# Allegro board Pressure_v1.0_BL.brd
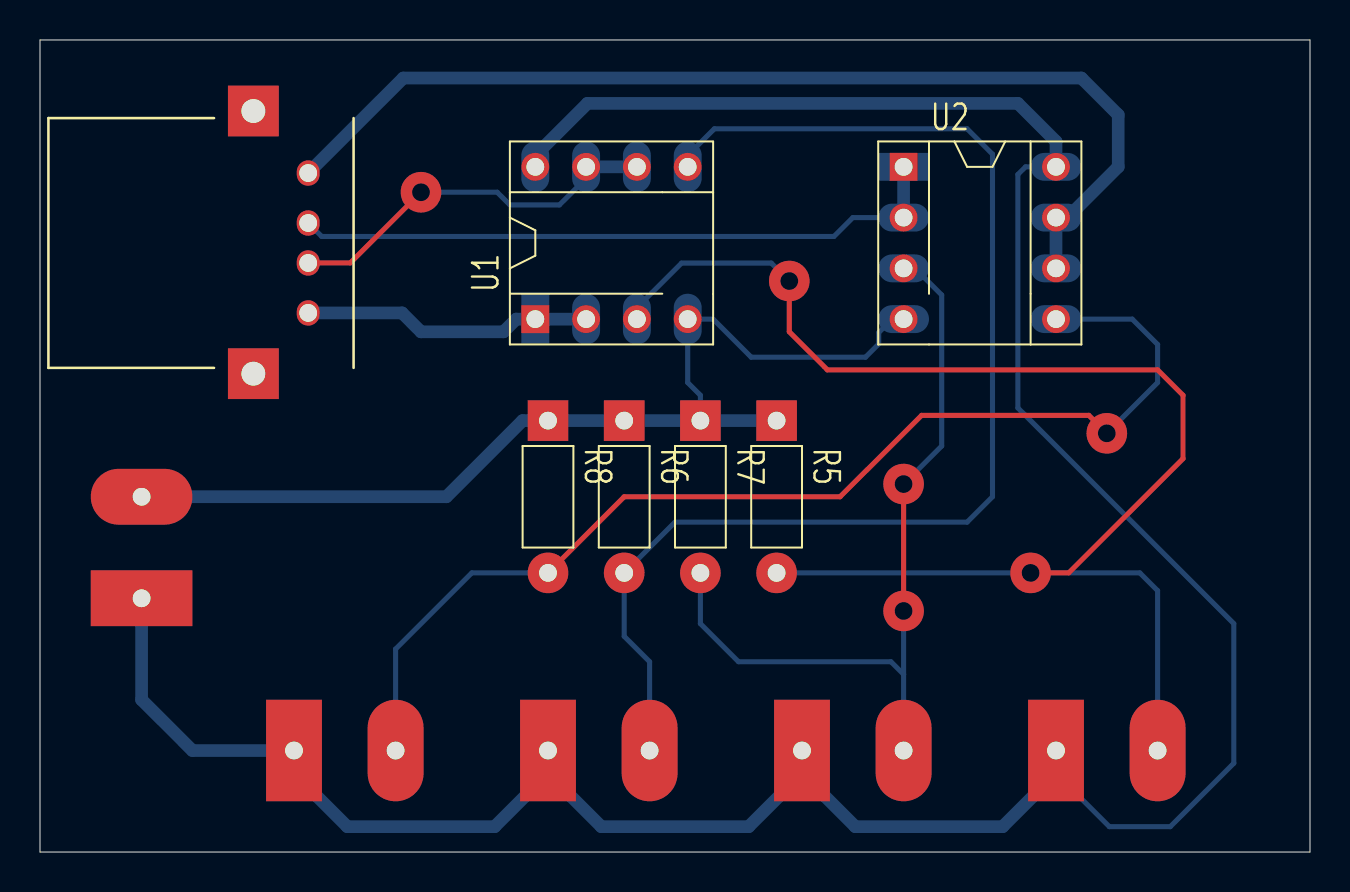
[diagram p0: board, top side]
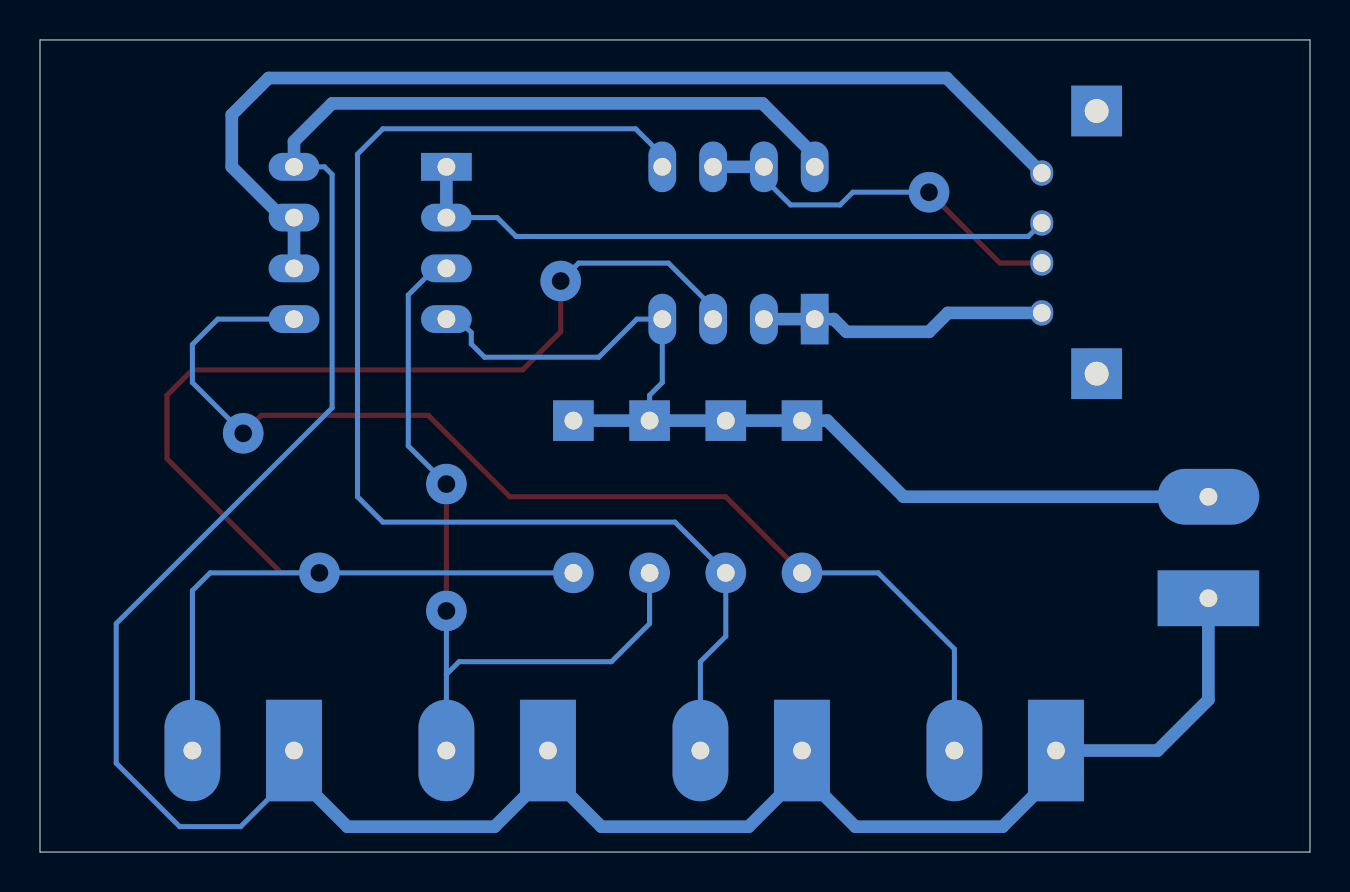
[diagram p1: board, bottom side, seen from below]

Outline 63.5 x 40.64 mm; copper layers: TOP, BOTTOM. Coordinates in mm from the lower left corner of the outline.
Outline path: 0,40.64 0,0 63.5,0 63.5,40.64 0,40.64

## Design rules (mm)
constraint set DEFAULT: min track width 0.254

## Placement (name value [footprint] x y rotation side)
J3  4 HEADER  [USB-A]  12.7 30.48 270 top
J4  HEADER 2  [GU-TERMINAL2-200]  5.08 12.7 180 top
J5  HEADER 2  [GU-TERMINAL2-200]  12.7 5.08 90 top
J6  HEADER 2  [GU-TERMINAL2-200]  38.1 5.08 90 top
J7  HEADER 2  [GU-TERMINAL2-200]  25.4 5.08 90 top
J8  HEADER 2  [GU-TERMINAL2-200]  50.8 5.08 90 top
R5  100k  [GU-RC300]  36.83 21.59 270 top
R6  100k  [GU-RC300]  29.21 21.59 270 top
R7  100k  [GU-RC300]  33.02 21.59 270 top
R8  100k  [GU-RC300]  25.4 21.59 270 top
U1  LF353  [GU-DIPSOCK8]  24.77 26.67 90 top
U2  LF353  [GU-DIPSOCK8]  43.18 34.29 0 top

## Library data of the parts
J3 = 4 HEADER
J4-J8 = HEADER 2: User Part Number: TERMINAL2-200
R5-R8 = R
U1 U2 = LF353

## Footprints (pads in the part's own frame, mm; a bottom-side part is the same pattern mirrored in y, then rotated)
GU-DIPSOCK8
  rect 1.397x1.397 hole 0.889: 1(0,0)
  round 1.397 hole 0.889: 2(0,-2.54) 3(0,-5.08) 4(0,-7.62) 5(7.62,-7.62) 6(7.62,-5.08) 7(7.62,-2.54) 8(7.62,0)
GU-RC300
  rect 2.032x2.032 hole 0.889: 1(0,0)
  round 2.032 hole 0.889: 2(7.62,0)
GU-TERMINAL2-200
  rect 5.08x2.794 hole 0.889: 1(0,0)
  oval 5.08x2.794 hole 0.889: 2(0,-5.08)
USB-A
  rect 2.54x2.54 hole 1.194: (-6.604,-2.032) (6.54,-2.032)
  oval 1.27x1.143 hole 0.889: 1(-3.5,0.71) 2(-1,0.71) 3(1,0.71) 4(3.5,0.71)

## Nets
5V: J4.1 J5.1 J6.1 J7.1 J8.1 U1.8 U2.8
GND: J4.2 R5.1 R6.1 R7.1 R8.1 U1.4 U2.4
VOUT1: J3.4 U1.1 U1.2
VOUT2: J3.3 U1.6 U1.7(OUT)
VOUT3: J3.2 U2.1 U2.2
VOUT4: J3.1 U2.6 U2.7(OUT)
N57936: J8.2 R5.2 U1.3
N58002: J7.2 R6.2 U1.5
N58075: J6.2 R7.2 U2.3
N58149: J5.2 R8.2 U2.5

## Via types
v1: diameter 2.032, hole 0.889, TOP to BOTTOM, 6 vias

## Routing (per net, layer and track width the routed paths; a pad name or vN(x,y) marks a point on that pad's centre or on a via; arc(x,y) is an arc through that point)
5V: length 140.1
  BOTTOM w0.254: 38.1,3.94 J6.1 ; 25.4,3.94 J7.1 ; 50.8,3.94 53.47,1.27 56.52,1.27 59.69,4.45 59.69,11.43 48.9,22.23 48.9,33.91 49.28,34.29 U2.8
  BOTTOM w0.635: J4.1 5.08,7.62 7.62,5.08 J5.1 12.7,3.94 15.37,1.27 22.73,1.27 25.4,3.94 28.07,1.27 35.43,1.27 38.1,3.94 40.77,1.27 48.13,1.27 50.8,3.94 J8.1 ; U2.8 50.8,35.56 48.9,37.47 27.37,37.47 24.77,34.86 U1.8
GND: length 51.4
  BOTTOM w0.254: U2.4 42.61,26.67 41.93,26 41.93,25.42 41.28,24.77 35.56,24.77 33.66,26.67 U1.4 32.39,23.5 33.02,22.86 R7.1
  BOTTOM w0.635: R5.1 R7.1 R6.1 R8.1 24.13,21.59 20.32,17.78 J4.2
VOUT1: length 14.5
  BOTTOM w0.635: U1.2 U1.1 23.81,26.67 23.18,26.04 19.05,26.04 18.11,26.98 J3.4
VOUT2: length 19.3
  TOP w0.254: J3.3 15.51,29.48 v1(19.05,33.02)
  BOTTOM w0.254: v1(19.05,33.02) 22.86,33.02 23.5,32.38 25.97,32.38 27.31,33.72 U1.7
  BOTTOM w0.635: U1.7 U1.6
VOUT3: length 33
  BOTTOM w0.254: U2.2 40.64,31.75 39.7,30.81 14.08,30.81 J3.2
  BOTTOM w0.635: U2.1 U2.2
VOUT4: length 52.5
  BOTTOM w0.635: J3.1 18.16,38.73 52.07,38.73 53.91,36.89 53.91,34.29 51.37,31.75 U2.7 U2.6
N57936: length 73.6
  TOP w0.254: v1(49.53,13.97) 51.44,13.97 57.15,19.68 57.15,22.86 55.88,24.13 39.37,24.13 37.47,26.04 v1(37.47,28.58)
  BOTTOM w0.254: R5.2 v1(49.53,13.97) 54.99,13.97 55.88,13.08 J8.2 ; U1.3 29.85,27.24 32.08,29.47 36.57,29.47 v1(37.47,28.58)
N58002: length 63.4
  BOTTOM w0.254: U1.5 32.39,34.86 33.72,36.2 46.36,36.2 47.62,34.92 47.62,17.78 46.36,16.51 31.75,16.51 R6.2 29.21,10.79 30.48,9.53 J7.2
N58075: length 39.8
  TOP w0.254: v1(43.18,12.06) v1(43.18,18.41)
  BOTTOM w0.254: R7.2 33.02,11.43 34.93,9.53 42.55,9.53 43.18,8.89 ; J6.2 43.18,8.89 ; 43.18,8.89 v1(43.18,12.06) ; U2.3 43.75,29.21 45.09,27.88 45.09,20.32 v1(43.18,18.41)
N58149: length 57
  TOP w0.254: R8.2 29.21,17.78 40.01,17.78 44.08,21.85 52.44,21.85 v1(53.34,20.96)
  BOTTOM w0.254: R8.2 21.59,13.97 17.78,10.16 J5.2 ; v1(53.34,20.96) 55.88,23.5 55.88,25.4 54.61,26.67 U2.5
